# Altium PCB LCD.PcbDoc
Units mm, origin at the board's own origin, x right, y up, seen from the top; angles counter-clockwise.
Board outline 63.5 x 93.34 mm, 2 copper layers (Top Layer, Bottom Layer); 14 components, 36 nets, 154 pads, 127 vias.
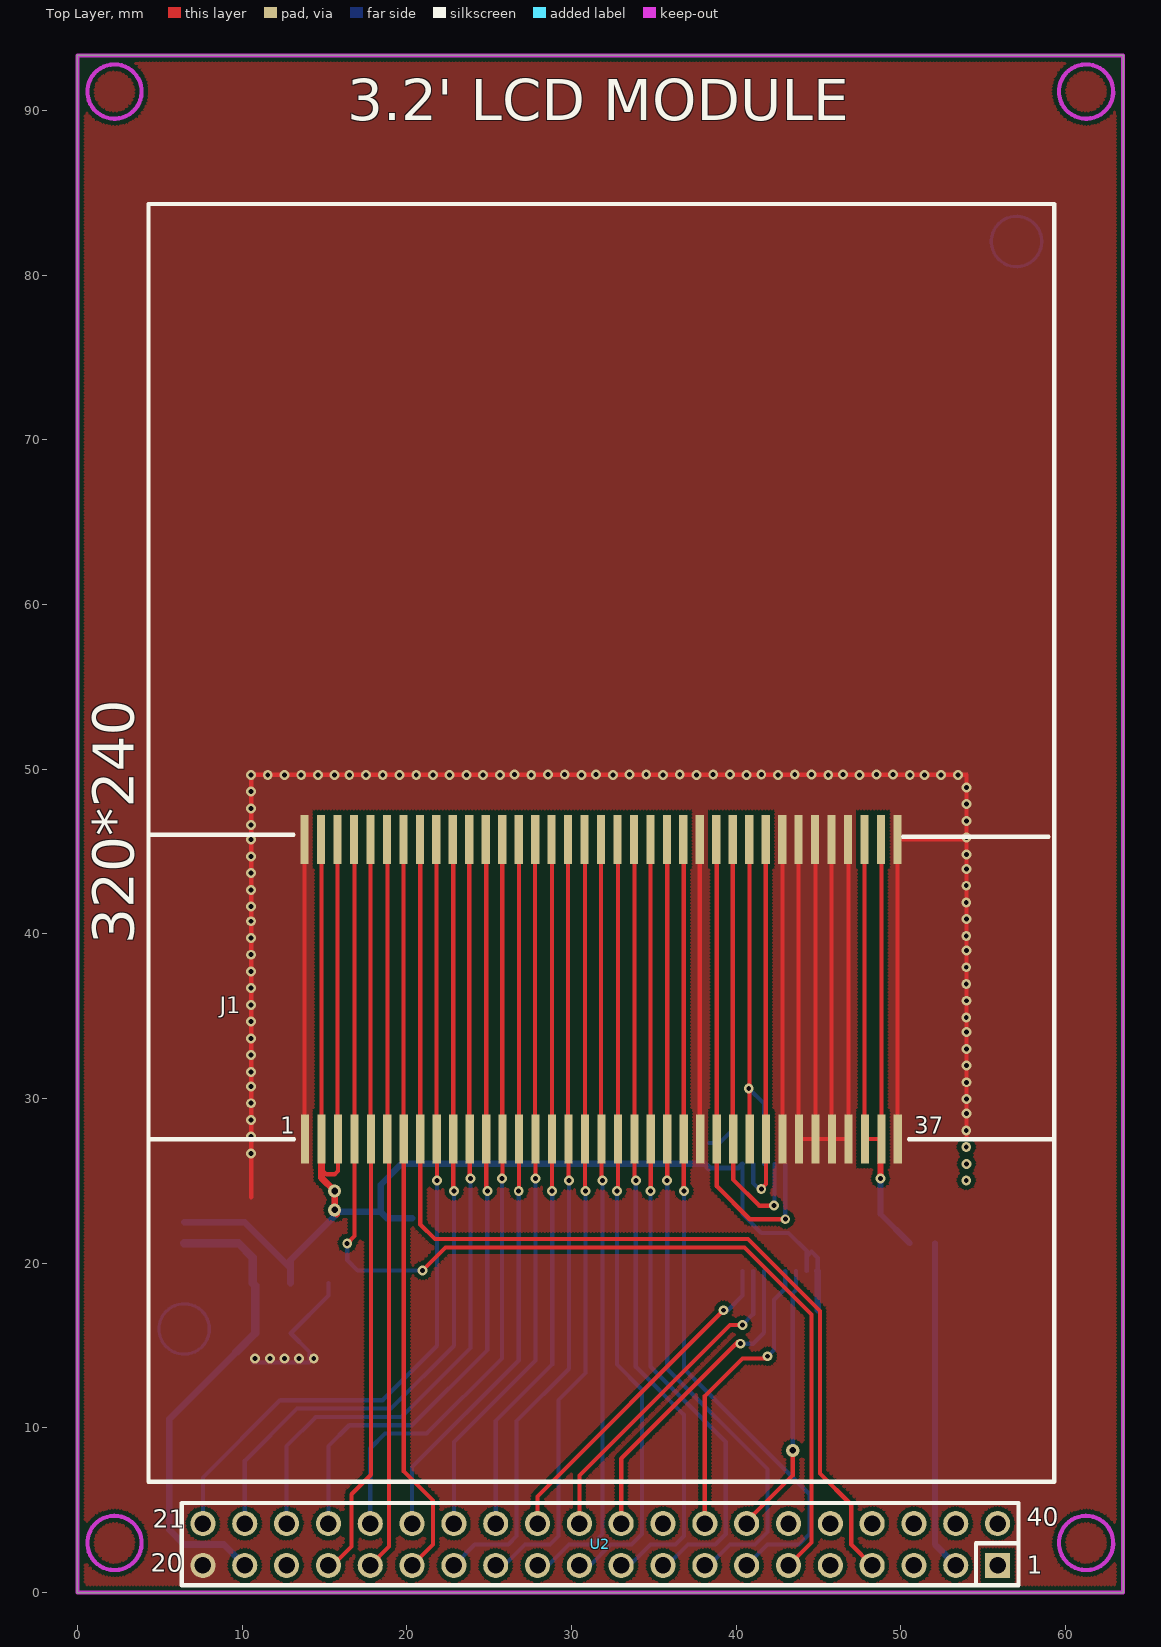
[diagram p0: Top Layer view]
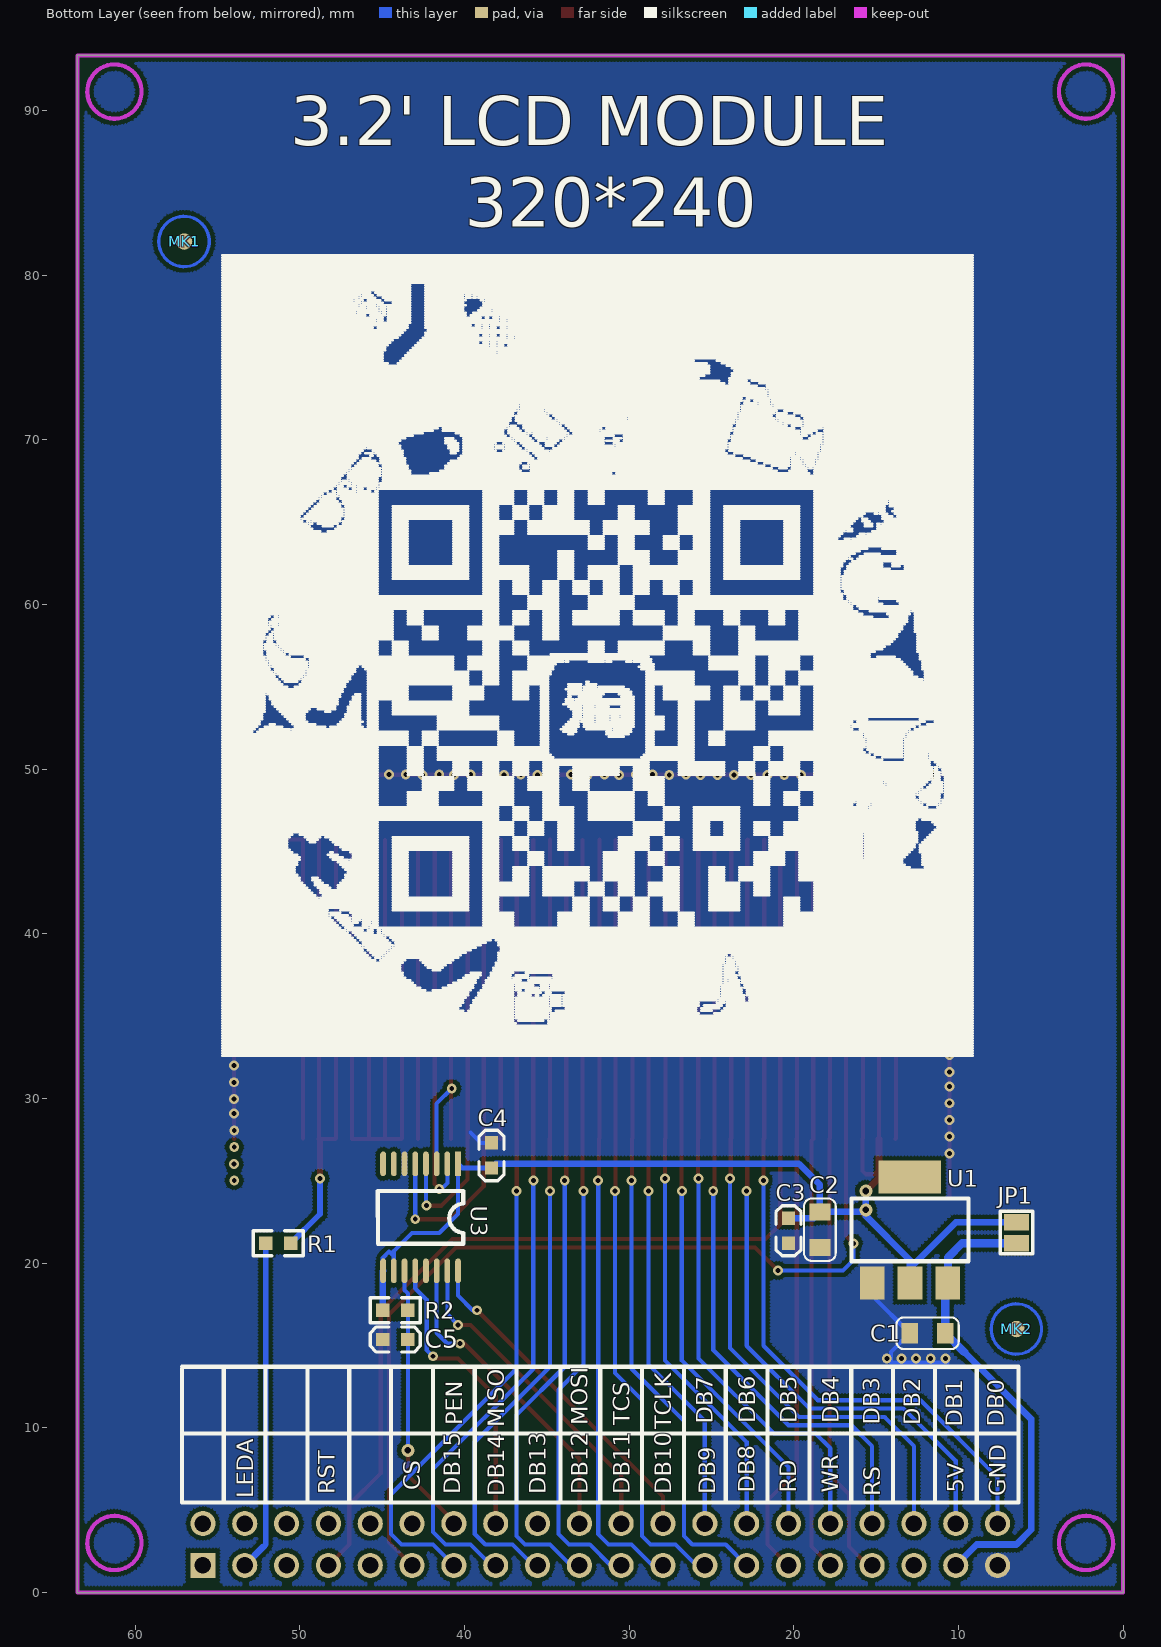
[diagram p1: Bottom Layer view, seen from below]

## Layer stack, top to bottom
Top Solder: solder mask 0.0102, Solder Resist, Dk 3.5
Top Layer: signal copper 0.0356
Dielectric 1: dielectric 0.32, FR-4, Dk 4.8
Bottom Layer: signal copper 0.0356
Bottom Solder: solder mask 0.0102, Solder Resist, Dk 3.5

## Board outline
0,0 63.5,0 63.5,93.345 0,93.345

## Design rules (kind name [scope] priority, off if disabled: settings)
Clearance [All] p1: gap=0.254
PlaneConnect [All] p1: planeconnectstyle=Direct reliefexpansion=0.508 reliefentries=4 reliefconductorwidth=0.254 reliefairgap=0.254
PolygonConnect [All] p1: connectstyle=Direct reliefconductorwidth=0.254 reliefentries=4 polygonreliefangle="90 Angle" airgapwidth=0.254
RoutingVias [All] p1: holewidth=0.711 width=1.27 viastyle="Through Hole" minholewidth=0.711 minwidth=1.27 maxholewidth=0.711 maxwidth=1.27
SolderMaskExpansion [All] p1: expansion=0.102
UnpouredPolygon [All] p1: allowunpoured=FALSE
Width [All] p1: maxlimit=1 minlimit=0.2 preferedwidth=0.254 minimp=50.000000 maximp=50.000000 favimp=50.000000
28 further rules are at their usual default settings.

## Components (designator, comment, footprint, x,y, rotation, side; value= is the part's Value field where it differs from the comment)
C1 "22uF/16V" 0805C 10.795,15.748 r0 bottom
C2 "22uF/16V" 0805C 18.415,23.114 r270 bottom
C3 "104" C0603 20.32,22.733 r270 bottom
C4 "104" C0603 38.354,25.781 r90 bottom
C5 "104" C0603 43.434,15.367 r0 bottom
J1 "CON37" 3.2_37PIN_ILI9341B 4.318,6.731 r0 top
JP1 "" J 6.477,21.209 r90 bottom
MK1 "" MARK 57.023,82.042 r180 bottom
MK2 "" MARK 6.477,16.002 r180 bottom
R1 "3.9R" R0603 52.07,21.209 r180 bottom
R2 "10K" R0603 44.958,17.145 r180 bottom
U1 "AMS1117-3.3" SOT-223/P2.3 15.24,18.796 r180 bottom
U2 "3.2LCD" LCD-DIP 31.75,2.921 r0 top
U3 "XPT2046/ADS7843" TSSOP-16 40.386,26.035 r270 bottom

## Footprints (in the part's own frame and the unit in brackets; to place one, negate y for a bottom-side part, rotate by r counter-clockwise, add the part's x,y. Pads: shape width x height; smd on the part's side, far side on the other; paste and mask are expansions set on the pad)
3.2_37PIN_ILI9341B [mm]
  rect 0.5x3 smd: 1(9.478,39) 1(9.503,20.815) 2(10.478,39) 2(10.503,20.815) 3(11.478,39) 3(11.503,20.815) 4(12.478,39) 4(12.503,20.815) 5(13.478,39) 5(13.503,20.815) 6(14.478,39) 6(14.503,20.815) 7(15.478,39) 7(15.503,20.815) 8(16.478,39) 8(16.503,20.815) 9(17.478,39) 9(17.503,20.815) 10(18.478,39) 10(18.503,20.815) 11(19.478,39) 11(19.503,20.815) 12(20.478,39) 12(20.503,20.815) 13(21.478,39) 13(21.503,20.815) 14(22.478,39) 14(22.503,20.815) 15(23.478,39) 15(23.503,20.815) 16(24.478,39) 16(24.503,20.815) 17(25.478,39) 17(25.503,20.815) 18(26.478,39) 18(26.503,20.815) 19(27.478,39) 19(27.503,20.815) 20(28.478,39) 20(28.503,20.815) 21(29.478,39) 21(29.503,20.815) 22(30.478,39) 22(30.503,20.815) 23(31.478,39) 23(31.503,20.815) 24(32.478,39) 24(32.503,20.815) 25(33.478,39) 25(33.503,20.815) 26(34.478,39) 26(34.503,20.815) 27(35.478,39) 27(35.503,20.815) 28(36.478,39) 28(36.503,20.815) 29(37.478,39) 29(37.503,20.815) 30(38.478,39) 30(38.503,20.815) 31(39.478,39) 31(39.503,20.815) 32(40.478,39) 32(40.503,20.815) 33(41.478,39) 33(41.503,20.815) 34(42.478,39) 34(42.503,20.815) 35(43.478,39) 35(43.503,20.815) 36(44.478,39) 36(44.503,20.815) 37(45.478,39) 37(45.503,20.815)
  silkscreen extent 0,0 55,77.6
0805C [mil]
  rect 40x50 smd: 1(0,0) 2(85,0)
  silkscreen extent -32,-38 117,38, body extent 3,-25 82,25, height 30
C0603 [mil]
  rect 32x32 smd: 1(0,0) 2(60,0)
  silkscreen extent -30,-30 90,30
J [mm]
  rect 1x1.5 smd: 1(0.004,0) 2(1.27,0)
  silkscreen extent -0.64,-0.99 1.96,0.99
LCD-DIP [mil] "40"
  rect 60x60 hole 39.37: 1(950,-50)
  round 60 hole 39.37: 2(850,-50) 3(750,-50) 4(650,-50) 5(550,-50) 6(450,-50) 7(350,-50) 8(250,-50) 9(150,-50) 10(50,-50) 11(-50,-50) 12(-150,-50) 13(-250,-50) 14(-350,-50) 15(-450,-50) 16(-550,-50) 17(-650,-50) 18(-750,-50) 19(-850,-50) 20(-950,-50) 21(-950,50) 22(-850,50) 23(-750,50) 24(-650,50) 25(-550,50) 26(-450,50) 27(-350,50) 28(-250,50) 29(-150,50) 30(-50,50) 31(50,50) 32(150,50) 33(250,50) 34(350,50) 35(450,50) 36(550,50) 37(650,50) 38(750,50) 39(850,50) 40(950,50)
  Keep-Out Layer lines w10: -1162.48,-61.33 cw(c-1161.42,3.62) -1159.24,-61.3 ; -1162.48,3408.67 cw(c-1161.42,3473.62) -1159.24,3408.7 ; 1160.36,-61.33 cw(c1161.42,3.62) 1163.6,-61.3 ; 1160.36,3408.67 cw(c1161.42,3473.62) 1163.6,3408.7
  silkscreen extent -1001,-97 1000,99
MARK [mm]
  round 3 on Bottom Solder: 0(0,0)
  round 1 smd: 1(0,0)
  Top Layer circle w0.2: c-0.005,0.005 r1.53
R0603 [mil]
  rect 32x32 smd: 1(0,0) 2(60,0)
  silkscreen extent -30,-30 90,30
SOT-223/P2.3 [mil]
  rect 59x79 smd: 1(0,0) 2(90.55,0) 3(181.1,0)
  rect 150x79 smd: 4(89.88,253.54)
  silkscreen extent -49,52 231,202
TSSOP-16 [mm]
  rect 1.5x0.35 smd: 1(0,0)
  oval 1.5x0.35 smd: 2(0,-0.65) 3(0,-1.3) 4(0,-1.95) 5(0,-2.6) 6(0,-3.25) 7(0,-3.9) 8(0,-4.55) 9(6.5,-4.55) 10(6.5,-3.9) 11(6.5,-3.25) 12(6.5,-2.6) 13(6.5,-1.95) 14(6.5,-1.3) 15(6.5,-0.65) 16(6.5,0)
  silkscreen extent 1.64,-4.88 4.86,0.31

## Part data
C1 C2: library part "CAPACITOR POL", "Capacitor"
C3 C4 C5: library part CAP, "Capacitor"
J1: library part "Header 37", "Header, 6-Pin"
JP1: library part "Header 2", "Header, 2-Pin"
MK1 MK2: library part MARK
R1 R2: library part RES2
U1: library part AMS1117
U3: library part XPT2046

## Via types
v1: diameter 0.6, hole 0.3, Top Layer to Bottom Layer, 124 vias
v2: diameter 0.8, hole 0.4, Top Layer to Bottom Layer, 3 vias

## Nets (pads, with @x,y where several pads share a name; then routed paths per layer and width w, separated by ;. In a path a pad name is that pad's centre, name@x,y a point inside that pad or via, vN(x,y) a via of type N, cw(c..) or ccw(c..) an arc to the next point about the centre after c; other vN are vias at no path point)
3V3: C2.1 C3.1 C4.1 J1.2 J1.3 JP1.2 R2.1 U1.2 U3.1 U3.9 U3.10 | length 101.2
  Top Layer w0.254: J1.2@14.796,45.731 14.821,45.706 J1.2@14.821,27.546 ; 14.821,25.692 15.113,25.4 15.621,25.4 15.821,25.6 15.821,27.546 15.796,27.572 J1.3@15.796,45.731
  Top Layer w0.4: J1.2@14.821,27.546 14.821,25.692 14.821,25.184 v2(15.621,24.384) 15.621,23.114 v2@15.748,22.987
  Bottom Layer w0.254: U3.1 40.386,22.987 41.529,21.844 43.18,21.844 44.286,20.738 44.286,20.41 ; U3.10 44.286,20.41 ; U3.9 44.958,19.557 44.958,20.32 44.577,20.701 44.286,20.41
  Bottom Layer w0.3: C4.1 40.132,25.781 U3.1
  Bottom Layer w0.4: JP1.2 10.16,22.479 U1.2@12.94,19.699 ; U1.2 U1.2@12.94,19.699 ; v2(15.621,24.384) v2@15.621,23.114 ; C3.1 18.796,22.733 C2.1 ; C4.1 38.1,26.035 19.685,26.035 18.415,24.765 C2.1 ; U3.9 44.958,19.513 R2.1 ; U1.2@12.94,19.699 12.94,20.179 15.621,22.86 v2@15.621,23.114 ; v2@15.621,23.114 C2.1
  other v2: 15.621,23.241
5V: C1.1 JP1.1 U1.3 U2.19 | length 28.7
  Bottom Layer w0.4: 9.652,14.605 5.588,10.541 5.588,3.81 6.477,2.921 8.89,2.921 U2.19
  Bottom Layer w0.5: JP1.1 9.775,21.213 10.64,20.348 U1.3 10.795,18.641 C1.1 9.652,14.605
CS: J1.4 U2.6 | length 72.3
  Top Layer w0.254: v1(16.383,21.209) 16.821,21.647 16.821,27.546 16.821,45.706 J1.4@16.796,45.731 ; v1(20.955,19.558) 22.352,20.955 40.513,20.955 44.577,16.891 44.577,3.048 U2.6
  Bottom Layer w0.254: v1(16.383,21.209) 16.383,20.193 17.018,19.558 v1(20.955,19.558)
DB0: J1.9 U2.21 | length 51.1
  Top Layer w0.254: J1.9@21.796,27.572 J1.9@21.796,45.731 ; J1.9@21.821,27.546 21.844,27.523 v1(21.844,25.019)
  Bottom Layer w0.254: U2.21 7.62,6.985 12.319,11.684 18.542,11.684 21.844,14.986 v1(21.844,25.019)
DB1: J1.10 U2.22 | length 50.1
  Top Layer w0.254: J1.10@22.796,45.731 22.821,45.706 22.821,27.546 v1@22.821,24.423
  Bottom Layer w0.254: U2.22 10.16,8.001 13.335,11.176 19.05,11.176 22.86,14.986 v1(22.86,24.384)
DB2: J1.11 U2.23 | length 49.2
  Top Layer w0.254: J1.11@23.796,45.731 23.796,27.572 23.821,27.546 v1@23.821,25.201
  Bottom Layer w0.254: U2.23 12.7,8.89 14.478,10.668 19.685,10.668 23.876,14.859 v1(23.876,25.146)
DB3: J1.12 U2.24 | length 47.7
  Top Layer w0.254: v1@24.821,24.455 24.821,27.546 J1.12@24.821,45.706
  Bottom Layer w0.254: U2.24 15.24,8.89 16.51,10.16 20.32,10.16 24.892,14.732 v1(24.892,24.384)
DB4: J1.13 U2.25 | length 46.3
  Top Layer w0.254: J1.13@25.796,27.572 J1.13@25.796,45.731 ; v1@25.821,25.186 J1.13@25.821,27.546
  Bottom Layer w0.254: U2.25 17.78,8.763 18.669,9.652 21.209,9.652 25.781,14.224 v1(25.781,25.146)
DB5: J1.14 U2.26 | length 44.2
  Top Layer w0.254: v1(26.797,24.384) 26.821,24.408 26.821,27.546 J1.14@26.821,45.706
  Bottom Layer w0.254: U2.26 20.32,7.62 26.797,14.097 v1(26.797,24.384)
DB6: J1.15 U2.27 | length 43.6
  Top Layer w0.254: J1.15@27.796,27.572 J1.15@27.796,45.731 ; v1@27.821,25.154 J1.15@27.821,27.546
  Bottom Layer w0.254: U2.27 22.86,9.144 27.813,14.097 v1(27.813,25.146)
DB7: J1.16 U2.28 | length 42.9
  Top Layer w0.254: v1@28.821,24.392 28.821,27.546 J1.16@28.821,45.706
  Bottom Layer w0.254: U2.28 25.4,10.414 28.829,13.843 v1(28.829,24.384)
DB8: J1.17 U2.14 | length 48.1
  Top Layer w0.254: J1.17@29.796,27.572 J1.17@29.796,45.731 ; v1@29.821,25.043 J1.17@29.821,27.546
  Bottom Layer w0.254: U2.14 24.13,2.921 26.162,2.921 26.67,3.429 26.67,10.414 29.845,13.589 v1(29.845,25.019)
DB9: J1.18 U2.13 | length 47.5
  Top Layer w0.254: v1@30.821,24.424 30.821,27.546 J1.18@30.821,45.706
  Bottom Layer w0.254: U2.13 25.908,1.651 27.178,2.921 28.702,2.921 29.21,3.429 29.21,11.684 30.861,13.335 v1(30.861,24.384)
DB10: J1.19 U2.12 | length 46.8
  Top Layer w0.254: J1.19@31.796,27.572 J1.19@31.796,45.731 ; v1@31.821,25.075 J1.19@31.821,27.546
  Bottom Layer w0.254: U2.12 28.575,1.651 29.845,2.921 31.242,2.921 31.877,3.556 v1(31.877,25.019)
DB11: J1.20 U2.11 | length 47.3
  Top Layer w0.254: v1@32.821,24.439 32.821,27.546 J1.20@32.821,45.706
  Bottom Layer w0.254: U2.11 31.115,1.651 32.385,2.921 33.655,2.921 34.29,3.556 34.29,12.319 32.766,13.843 v1(32.766,24.384)
DB12: J1.21 U2.10 | length 47.9
  Top Layer w0.254: v1@33.821,25.107 33.821,27.546 J1.21@33.821,45.706
  Bottom Layer w0.254: U2.10 33.528,1.651 34.798,2.921 36.322,2.921 36.83,3.429 36.83,10.795 33.909,13.716 v1(33.909,25.019)
DB13: J1.22 U2.9 | length 48.6
  Top Layer w0.254: J1.22@34.796,27.572 J1.22@34.796,45.731 ; v1@34.821,24.407 J1.22@34.821,27.546
  Bottom Layer w0.254: v1(34.798,24.384) 34.798,13.716 39.37,9.144 39.37,3.556 38.735,2.921 37.084,2.921 35.814,1.651 U2.9
DB14: J1.23 U2.8 | length 49.2
  Top Layer w0.254: v1@35.821,25.026 35.821,27.546 J1.23@35.821,45.706
  Bottom Layer w0.254: v1(35.814,25.019) 35.814,13.589 41.91,7.493 41.91,3.683 41.148,2.921 39.624,2.921 38.354,1.651 U2.8
DB15: J1.24 U2.7 | length 49.9
  Top Layer w0.254: J1.24@36.796,45.731 36.821,45.706 36.821,27.546 36.821,24.393 v1(36.83,24.384)
  Bottom Layer w0.254: v1(36.83,24.384) 36.83,13.589 44.45,5.969 44.45,3.556 43.815,2.921 41.91,2.921 U2.7
LED_A: R1.1 U2.2 | length 20.1
  Bottom Layer w0.35: R1.1 52.07,2.921 52.197,2.794
  Bottom Layer w0.4: 52.197,2.794 U2.2
LED_K1: C1.2 C2.2 C3.2 C4.2 C5.2 J1.1 J1.25 J1.30 J1.31 J1.32 J1.33 J1.34 J1.37 U1.1 U2.20 U3.6 | length 255
  Top Layer w0.254: 10.541,24.003 10.552,24.014 10.552,49.668 53.986,49.668 v1@53.986,45.731 ; J1.1@13.796,45.731 13.796,27.572 J1.1@13.821,27.546 ; J1.25@37.796,45.731 37.796,27.572 J1.25@37.821,27.546 ; J1.30@42.821,27.546 J1.30@42.821,45.706 ; J1.31@43.796,27.572 J1.31@43.796,45.731 ; J1.31@43.821,27.546 J1.32@44.821,27.546 ; J1.32@44.821,45.706 J1.32@44.821,27.546 ; J1.33@45.796,27.572 J1.33@45.796,45.731 ; J1.34@46.821,45.706 46.821,27.546 45.821,27.546 J1.32@44.821,27.546 ; J1.37@49.796,27.572 49.796,45.731 v1@53.986,45.731 ; 53.975,27.559 53.986,27.57 v1@53.986,45.731
  Bottom Layer w0.254: v1@10.668,13.97 14.097,13.97 14.097,14.605 C1.2 15.24,18.034 U1.1 ; C4.2 38.989,27.305 39.624,27.94
  other v1: 10.795,14.224 11.684,14.224 12.573,14.224 13.462,14.224 14.351,14.224 10.541,26.67 10.552,27.686 53.975,28.067 10.552,28.702 53.986,29.083 10.541,29.718 53.986,29.972 10.552,30.734 53.997,30.988 10.541,31.623 53.986,32.004 10.552,32.639 53.986,33.02 10.552,33.655 53.997,34.036 10.541,34.671 53.975,34.925 10.552,35.687 53.986,35.941 10.541,36.703 53.975,36.957 10.552,37.719 53.975,37.973 10.552,38.735 53.986,38.989 10.541,39.751 53.975,39.878 10.552,40.767 53.986,40.894 10.53,41.656 53.975,41.91 10.541,42.672 53.975,42.926 10.541,43.688 53.986,43.942 10.53,44.704 53.986,44.831 10.541,45.72 53.997,45.847 10.53,46.609 53.986,46.863 10.541,47.625 53.986,47.879 10.541,48.641 53.997,48.895 10.53,49.657 11.557,49.657 12.573,49.646 13.589,49.657 14.605,49.657 15.621,49.646 16.51,49.657 17.526,49.646 18.542,49.657 19.558,49.657 20.574,49.646 21.59,49.657 22.606,49.646 23.622,49.657 24.638,49.657 25.654,49.646 26.543,49.668 27.559,49.657 28.575,49.668 29.591,49.668 30.607,49.657 31.496,49.668 32.512,49.657 33.528,49.668 34.544,49.668 35.56,49.657 36.576,49.668 37.592,49.657 38.608,49.668 39.624,49.668 40.64,49.657 41.529,49.668 42.545,49.657 43.561,49.668 44.577,49.668 45.593,49.657 46.482,49.668 47.498,49.657 48.514,49.668 49.53,49.668 50.546,49.657 51.435,49.657 52.451,49.646 53.467,49.657
NetJ1_35: J1.35 J1.36 R1.2 | length 44.3
  Top Layer w0.254: J1.35@47.796,27.572 J1.35@47.796,45.731 ; J1.35@47.821,27.546 J1.36@48.715,27.546 ; J1.36@48.821,27.546 J1.36@48.821,45.706
  Top Layer w0.35: v1(48.768,25.146) 48.768,27.493 J1.36@48.821,27.546
  Bottom Layer w0.35: v1(48.768,25.146) 48.768,22.987 R1.2
RD: J1.7 U2.15 | length 45.3
  Top Layer w0.254: J1.7@19.796,45.731 19.796,27.572 19.821,27.546 19.821,7.357 21.59,5.588 21.59,2.921 U2.15
RESET: J1.8 U2.4 | length 66.6
  Top Layer w0.254: J1.8@20.796,45.731 20.821,45.706 20.821,27.546 20.821,22.359 21.717,21.463 40.723,21.463 45.085,17.101 45.085,7.239 46.99,5.334 46.99,2.921 U2.4
RS: J1.5 U2.17 | length 45.3
  Top Layer w0.254: U2.17 15.494,1.651 16.637,2.794 16.637,5.969 17.821,7.153 17.821,27.546 17.796,27.572 J1.5@17.796,45.731
T_BUSY: U2.32
T_CLK: U2.29 U3.16 | length 20.6
  Top Layer w0.254: U2.29 27.94,5.842 v1(39.243,17.145)
  Bottom Layer w0.254: v1(39.243,17.145) 39.497,17.145 40.386,18.034 U3.16
T_CS: U2.30 U3.15 | length 20.2
  Top Layer w0.254: U2.30 30.48,7.112 39.624,16.256 v1(40.386,16.256)
  Bottom Layer w0.254: v1(40.386,16.256) 41.036,16.906 U3.15
T_DIN: U2.31 U3.14 | length 19.6
  Top Layer w0.254: U2.31 33.02,8.128 40.132,15.24 v1(40.259,15.113)
  Bottom Layer w0.254: v1(40.259,15.113) 41.021,15.113 41.686,15.778 U3.14
T_IRQ: C5.1 R2.2 U2.34 U3.11 | length 16.6
  Top Layer w0.254: U2.34 40.64,4.318 43.434,7.112 v2(43.434,8.636)
  Bottom Layer w0.254: v2(43.434,8.636) C5.1 R2.2 43.434,18.161 43.636,18.363 U3.11
T_OUT: U2.33 U3.12 | length 18.3
  Top Layer w0.254: U2.33 38.1,11.938 40.386,14.224 41.783,14.224 v1@41.974,14.414
  Bottom Layer w0.254: v1(41.91,14.351) 42.291,14.732 42.291,17.78 42.986,18.475 U3.12
WR: J1.6 U2.16 | length 44.6
  Top Layer w0.254: U2.16 18.923,2.794 18.923,27.444 18.821,27.546 18.821,45.706 J1.6@18.796,45.731
X+: J1.29 U3.2 | length 23.2
  Top Layer w0.254: v1(41.529,24.511) 41.821,24.803 J1.29@41.821,27.546 ; J1.29@41.796,27.572 J1.29@41.796,45.731
  Bottom Layer w0.254: U3.2 41.036,24.877 v1@41.529,24.384
X-: J1.27 U3.4 | length 26.3
  Top Layer w0.254: J1.27@39.796,27.572 J1.27@39.796,45.731 ; J1.27@39.821,27.546 39.821,25.076 41.402,23.495 v1(42.291,23.495)
  Bottom Layer w0.254: v1(42.291,23.495) 42.336,23.54 U3.4
Y+: J1.28 U3.3 | length 23.1
  Top Layer w0.254: J1.28@40.821,27.546 J1.28@40.821,45.706
  Bottom Layer w0.254: v1(40.767,30.607) 41.686,29.688 U3.3
Y-: J1.26 U3.5 | length 29.4
  Top Layer w0.254: J1.26@38.821,45.706 38.821,27.546 38.821,24.679 40.827,22.673 v1(42.986,22.673)
  Bottom Layer w0.254: v1(42.986,22.673) U3.5
pads on no net: MK1.0 MK1.1 MK2.0 MK2.1 U1.4 U2.1 U2.3 U2.5 U2.18 U2.35 U2.36 U2.37 U2.38 U2.39 U2.40 U3.7 U3.8 U3.13
copper on no net:
  other v1: 53.975,25.019 53.986,26.035 53.975,27.051

## Polygon pours and split planes (outlines as drawn)
LED_K1 on Top Layer "Top Layer" (hatched 90Degree grid 0 track 0.2, remove dead copper, pour order 2): -8.001,98.679 -7.874,98.552 73.787,98.552 73.787,-10.287 74.041,-10.541 73.533,-10.033 -8.001,-10.033 -8.001,98.425 -7.747,98.679
LED_K1 on Bottom Layer "Top Layer" (hatched 90Degree grid 0 track 0.2, remove dead copper, pour order 4): -5.08,97.028 71.12,97.028 71.12,-3.175 71.374,-3.429 70.739,-4.064 -4.953,-4.064 -4.953,96.647 -5.334,97.028

## Keep-outs
Keep-Out Layer:
  the board outline again, w0.254

## Silkscreen, mask and mechanical layers (free items; w line width, h text height)
Top Overlay:
  text "3.2' LCD MODULE" at 16.381,89.408 h2.5
  text "320*240" at 3.429,39.37 h2.5 r90
Bottom Overlay:
  drawing of 2607 lines, arcs and shapes, not listed
  text "3.2' LCD MODULE" at 50.581,87.884 h3
  text "320*240" at 39.981,82.931 h3
  text "DB4" at 17.272,10.287 h1 r270
  text "DB5" at 19.812,10.287 h1 r270
  text "DB6" at 22.352,10.287 h1 r270
  text "DB7" at 24.919,10.26 h1 r270
  text "DB3" at 14.781,10.187 h1 r270
  text "DB2" at 12.319,10.16 h1 r270
  text "TCS" at 29.972,10.16 h1 r270
  text "MOSI" at 32.512,10.16 h1 r270
  text "PEN" at 40.132,10.16 h1 r270
  text "DB0" at 8.255,10.06 h1 r90
  text "DB1" at 9.779,10.06 h1 r270
  text "MISO" at 37.592,10.033 h1 r270
  text "TCLK" at 27.432,9.906 h1 r270
  text "CS" at 42.672,6.223 h1 r270
  text "5V" at 9.679,6.06 h1 r270
  text "WR" at 17.299,6.06 h1 r270
  text "RD" at 19.839,6.06 h1 r270
  text "DB8" at 22.379,6.06 h1 r270
  text "DB9" at 24.781,5.969 h1 r270
  text "DB10" at 27.432,5.969 h1 r270
  text "DB11" at 29.972,5.969 h1 r270
  text "DB12" at 32.512,5.969 h1 r270
  text "DB13" at 35.052,5.969 h1 r270
  text "DB15" at 40.259,5.969 h1 r270
  text "RST" at 47.879,5.969 h1 r270
  text "GND" at 7.139,5.86 h1 r270
  text "RS" at 14.759,5.86 h1 r270
  text "DB14" at 37.592,5.842 h1 r270
  text "LEDA" at 52.832,5.715 h1 r270

## Text inside footprints (layer, text, board x,y; h text height)
J1: Top Overlay "1" at 12.324,27.874 h1.02; Top Overlay "37" at 50.805,27.874 h1.02
U2: Top Overlay "21" at 4.572,3.937 h1.1; Top Overlay "20" at 4.445,1.27 h1.1; Top Overlay "1" at 57.658,1.143 h1.1; Top Overlay "40" at 57.658,4.064 h1.1